# EAGLE board untitled (EAGLE 7.5.0)

Size 100 x 80 mm. Coordinates in mm from the lower left corner, seen from the top.
Outline: 0,0 100,0 100,80 0,80 0,0
Copper layers (1*16): Top 0.035mm / dielectric 1.5mm / Bottom 0.035mm
Design rules "default": minimum track width 10mil, minimum drill 24mil, track to track 8mil, track to pad 8mil, pad to pad 8mil, via to via 8mil, smd to smd 8mil, copper to edge 40mil, drill to drill 8mil, minimum pad ring 10mil, minimum via ring 8mil, stop-mask expansion 4mil, vias tented up to drill 0mil, thermal gap 10mil

## Footprints (pad centres in the part's own frame; a part is rotated, then mirrored left to right if it is on the bottom)
0207/10 = drill 0.813 octagon: 1 -5.08,0; 2 5.08,0
LED3MM = drill 0.813 octagon: A -1.27,0; K 1.27,0
TO92 = drill 0.813 octagon: 1 -1.27,0; 2 0,1.905; 3 1.27,0
HC49U = drill 0.7 pad 1.2: 1 -2.413,0; 2 -0.027,0; 3 2.413,0
SPDIP28_300MC = drill 0.991 square: 1 -7.62,33.02 | drill 0.991: 2 -7.62,30.48; 3 -7.62,27.94; 4 -7.62,25.4; 5 -7.62,22.86; 6 -7.62,20.32; 7 -7.62,17.78; 8 -7.62,15.24; 9 -7.62,12.7; 10 -7.62,10.16; 11 -7.62,7.62; 12 -7.62,5.08; 13 -7.62,2.54; 14 -7.62,0; 15 0,0; 16 0,2.54; 17 0,5.08; 18 0,7.62; 19 0,10.16; 20 0,12.7; 21 0,15.24; 22 0,17.78; 23 0,20.32; 24 0,22.86; 25 0,25.4; 26 0,27.94; 27 0,30.48; 28 0,33.02
C2.5-3 = drill 0.813 pad 1.6 octagon: 1 -1.27,0; 2 1.27,0
C050-024X044 = drill 0.813 octagon: 1 -2.54,0; 2 2.54,0

## Placement (x,y rotation side)
L2  [0207/10]  -19.05,46.99 0 top  (outside the outline)
L3  [0207/10]  -31.75,46.99 0 top  (outside the outline)
LED2  [LED3MM]  -30.48,53.34 0 top  (outside the outline)
MPC1702  LM317LZ  [TO92]  -41.91,40.64 0 top  (outside the outline)
ONLED  [LED3MM]  -21.59,53.34 0 top  (outside the outline)
ONRST1  330  [0207/10]  -44.45,46.99 0 top  (outside the outline)
QF1  ECS-10.7-7.5A  [HC49U]  -41.91,5.08 0 top  (outside the outline)
U1  PIC32MX250F128B-I_SP  [SPDIP28_300MC]  -25.4,2.54 0 top  (outside the outline)
VRCAP1  1  [C2.5-3]  -19.05,41.91 0 top  (outside the outline)
VRCAP2  10  [C050-024X044]  -26.67,41.91 0 top  (outside the outline)

## Library data of the parts
L2 L3 ONRST1 = resistor
LED2 ONLED = led
MPC1702 = linear
QF1 = crystal; OC_FARNELL: unknown; OC_NEWARK: unknown
U1 = PIC32MX250F128B
VRCAP1 = capacitor-wima
VRCAP2 = rcl

## Nets
AVDD: U1.28
AVSS: U1.27
N$1: MPC1702.3 ONLED.K VRCAP1.1 VRCAP2.2
N$2: MPC1702.2 ONRST1.2 VRCAP2.1
N$3: MPC1702.1 VRCAP1.2
N$5: ONLED.A ONRST1.1
VBUS: U1.15
VCAP: U1.20
VDD: U1.13
VSS: U1.19
VSS_2: U1.8
VUSB3V3: U1.23

## Tracks (layer width: path | path; a pad name or v marks a point on that pad's centre or on a via)
N$1  (3 unrouted)
N$2  (2 unrouted)
N$3  (1 unrouted)
N$5  (1 unrouted)